# Allegro board PLL_SQ.brd
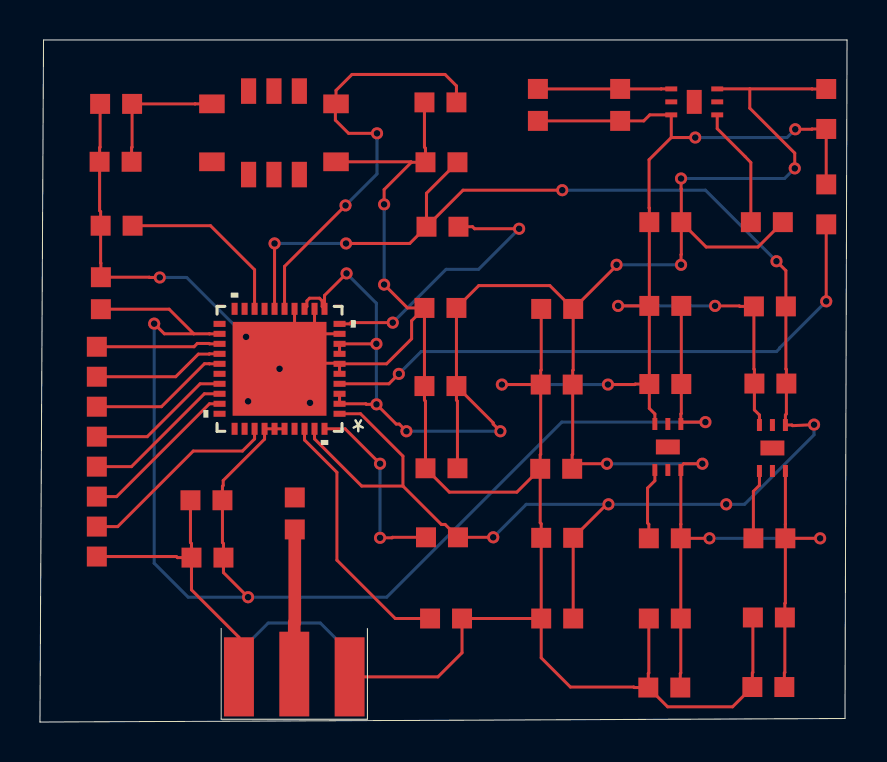
[diagram p0: board, top side]
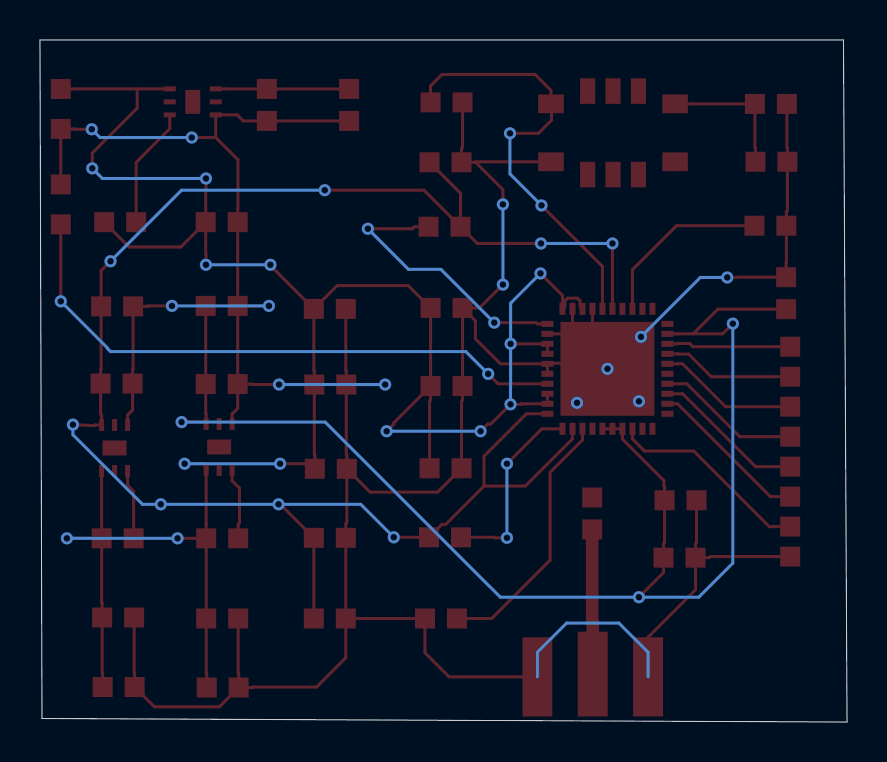
[diagram p1: board, bottom side, seen from below]

Outline 40.39 x 34.14 mm; copper layers: TOP, BOTTOM. Coordinates in mm from the lower left corner of the outline.
Outline path: 0,0 40.28,0.18 40.39,34.14 0.18,34.14 0,0

## Placement (name value [footprint] x y rotation side)
5V1  HEADER 2  [HEADER2]  39.34 30.68 270 top
C1  CAP  [CAPC1608N]  3.81 30.94 0 top
C2  CAP  [CAPC1608N]  3.78 28.04 0 top
C3  CAP  [CAPC1608N]  20.04 31.01 0 top
C4  CAP  [CAPC1608N]  20.09 28.02 0 top
C5  0.001uF  [CAPC1608N]  3.84 24.84 0 top
C6  CAP  [CAPC1608N]  20.04 20.73 0 top
C7  CAP  [CAPC1608N]  25.88 20.68 0 top
C8  1uF  [CAPC1608N]  3.05 21.46 90 top
C9  CAP  [CAPC1608N]  25.86 16.89 0 top
C10  1uF  [CAPC1608N]  20.04 16.81 0 top
C11  0.1uF  [CAPC1608N]  20.09 12.7 0 top
C12  0.1uF  [CAPC1608N]  25.83 12.67 0 top
C13  0.001uF  [CAPC1608N]  20.12 9.25 180 top
C14  100pF  [CAPC1608N]  12.75 10.44 90 top
C15  1uF  [CAPC1608N]  8.33 11.1 0 top
C16  0.1uF  [CAPC1608N]  8.38 8.23 0 top
C17  10pF  [CAPC1608N]  25.88 9.22 0 top
C18  0.1uF  [CAPC1608N]  25.88 5.18 0 top
C19  100pF  [CAPC1608N]  20.32 5.18 180 top
C20  1uF  [CAPC1608N]  36.53 20.8 0 top
C21  0.1uF  [CAPC1608N]  36.55 16.94 0 top
C22  0.1uF  [CAPC1608N]  36.47 5.23 0 top
C23  4.7uF  [CAPC1608N]  36.45 1.75 0 top
C24  1uF  [CAPC1608N]  24.92 30.89 90 top
C25  0.1uF  [CAPC1608N]  29.03 30.89 90 top
C26  0.1uF  [CAPC1608N]  31.29 25.02 0 top
C27  0.1uF  [CAPC1608N]  31.27 5.18 0 top
C28  4.5uF  [CAPC1608N]  31.24 1.73 0 top
C29  1uF  [CAPC1608N]  31.29 20.83 0 top
C30  0.1uF  [CAPC1608N]  31.29 16.92 0 top
GPIO_SPI1  GPIO_SPI  [HEADER8]  2.84 14.78 270 top
J1  SMA_3  [SMA_AMPHENOL_S]  12.73 4.52 270 top
LP5900_3V3_A1  LP5900  [SMP6_1_2]  36.65 13.72 180 top
LP5900_3V3_A2  LP5900  [SMP6_1_2]  32.74 31.04 270 top
LP5900_3V3_D1  LP5900  [SMP6_1_2]  31.42 13.77 180 top
PLL1  hmc701  [HCP_40_1]  11.99 17.68 180 top
PLL_OUT1  CON2  [HEADER2]  39.34 25.91 90 top
R1  0  [CAPC1608N]  20.14 24.79 180 top
R2  10K  [CAPC1608N]  36.5 9.19 0 top
R3  10K  [CAPC1608N]  36.37 25.02 0 top
R4  10K  [CAPC1608N]  31.27 9.19 0 top
U1  -  [D75J]  11.71 29.49 0 top

## Library data of the parts
5V1 = HEADER 2
C1-C30 = CAP
GPIO_SPI1 = 8 HEADER
J1 = SMA_3
LP5900_3V3_A1 LP5900_3V3_A2 LP5900_3V3_D1 = lp5900
PLL1 = hmc701
PLL_OUT1 = CON2
R1-R4 = RES
U1 = D75J

## Footprints (pads in the part's own frame, mm; a bottom-side part is the same pattern mirrored in y, then rotated)
CAPC1608N
  rect 1x1 smd: 1(-0.8,0) 2(0.8,0)
D75J
  rect 0.76x1.28 smd: 1(-1.27,-2.09) 2(0,-2.09) 3(1.27,-2.09) 6(1.27,2.09) 7(0,2.09) 8(-1.27,2.09)
  rect 1.28x0.94 smd: 4(3.105,-1.45) 5(3.105,1.45) 9(-3.105,1.45) 10(-3.105,-1.45)
HCP_40_1
  rect 0.605x0.305 smd: 1(-3.002,2.25) 2(-3.002,1.75) 3(-3.002,1.25) 4(-3.002,0.75) 5(-3.002,0.25) 6(-3.002,-0.25) 7(-3.002,-0.75) 8(-3.002,-1.25) 9(-3.002,-1.75) 10(-3.002,-2.25) 21(3.002,-2.25) 22(3.002,-1.75) 23(3.002,-1.25) 24(3.002,-0.75) 25(3.002,-0.25) 26(3.002,0.25) 27(3.002,0.75) 28(3.002,1.25) 29(3.002,1.75) 30(3.002,2.25)
  rect 0.305x0.605 smd: 11(-2.25,-3.002) 12(-1.75,-3.002) 13(-1.25,-3.002) 14(-0.75,-3.002) 15(-0.25,-3.002) 16(0.25,-3.002) 17(0.75,-3.002) 18(1.25,-3.002) 19(1.75,-3.002) 20(2.25,-3.002) 31(2.25,3.002) 32(1.75,3.002) 33(1.25,3.002) 34(0.75,3.002) 35(0.25,3.002) 36(-0.25,3.002) 37(-0.75,3.002) 38(-1.25,3.002) 39(-1.75,3.002) 40(-2.25,3.002)
  rect 4.7x4.7 smd: 41(0,0)
HEADER2
  rect 1x1 smd: 1(-1,0) 2(1,0)
HEADER8
  rect 1x1 smd: 1(-4,0) 2(-2.5,0) 3(-1,0) 4(0.5,0) 5(2,0) 6(3.5,0) 7(5,0) 8(6.5,0)
SMA_AMPHENOL_S
  rect 3.962x1.499 smd: 1(2.261,2.769) 3(2.261,-2.769)
  rect 4.242x1.499 smd: 2(2.121,0)
SMP6_1_2
  rect 0.25x0.6 smd: 1(-0.65,-1.15) 2(0,-1.15) 3(0.65,-1.15) 4(0.65,1.15) 5(0,1.15) 6(-0.65,1.15)
  rect 1.2x0.75 smd: 7(0,0)

## Nets
3VANALOG: C4.2(B) C13.1(A) C17.2(B) C18.2(B) C20.2(B) C21.2(B) LP5900_3V3_A1.1(OUT) PLL1.1(VCCPRS) PLL1.16(RVDD) PLL1.39(VCCHF) R1.2(B)
3VDIGITAL: C8.1(A) C15.2(B) C16.2(B) C29.2(B) C30.2(B) LP5900_3V3_D1.1(OUT) PLL1.22(DVDD1) PLL1.34(DVDIO) PLL1.35(DVDD2) PLL1.36(DVDDQ)
+5V: 5V1.1 C6.2(B) C7.2(B) C9.2(B) C10.2(B) C11.2(B) C12.2(B) C22.2(B) C23.2(B) C26.2(B) C27.2(B) C28.2(B) LP5900_3V3_A1.6(IN) LP5900_3V3_A2.6(IN) LP5900_3V3_D1.6(IN) PLL1.2(VCCOA) PLL1.3(VPPCP) PLL1.7(VPPDRV) PLL1.8(VDDPD) PLL1.11(VDDPDV) PLL1.13(VDDPDR) R2.2(B) R3.2(B) R4.2(B)
GND: 5V1.2 C1.1(A) C2.1(A) C3.1(A) C4.1(A) C5.1(A) C6.1(A) C7.1(A) C8.2(B) C9.1(A) C10.1(A) C11.1(A) C12.1(A) C15.1(A) C16.1(A) C17.1(A) C18.1(A) C19.1(A) C20.1(A) C21.1(A) C22.1(A) C23.1(A) C24.1(A) C25.1(A) C26.1(A) C27.1(A) C28.1(A) C29.1(A) C30.1(A) GPIO_SPI1.8 J1.1 J1.3 LP5900_3V3_A1.3(GND) LP5900_3V3_A2.3(GND) LP5900_3V3_D1.3(GND) PLL1.5(GNDCP) PLL1.6(GNDDRV) PLL1.9(GNDPD) PLL1.12(GNDPDV) PLL1.14(GNDPDR) PLL1.41(GND) PLL_OUT1.2 U1.4(GND)
GP01: GPIO_SPI1.1 PLL1.23(GP01)
GP02: GPIO_SPI1.2 PLL1.24(GP02)
GP03: GPIO_SPI1.3 PLL1.25(GP03)
PLL_OUT: PLL1.4(CP) PLL_OUT1.1
SCK: GPIO_SPI1.6 PLL1.29(SCK)
SDI: GPIO_SPI1.5 PLL1.28(SDI)
SDO: GPIO_SPI1.7 PLL1.33(LD_SDO)
SEN: GPIO_SPI1.4 PLL1.27(SEN)
TCXO_POWER: C24.2(B) C25.2(B) LP5900_3V3_A2.1(OUT)
TXCO_POWER: C1.2(B) C2.2(B) U1.9(VCC)
VCOIP: C14.1(A) J1.2
N78296: C19.2(B) PLL1.38(VCOIN)
N78304: C14.2(B) PLL1.37(VCOIP)
N78474: PLL1.10(N/C1) R1.1(A)
N78616: C5.2(B) PLL1.18(REFCAP)
N78878: LP5900_3V3_D1.4(EN) R4.1(A)
N79360: LP5900_3V3_A1.4(EN) R2.1(A)
N80357: C3.2(B) PLL1.15(XREFP) U1.5(OUT)
N81782: LP5900_3V3_A2.4(EN) R3.1(A)
N780341: C13.2(B) PLL1.40(BIAS)

Pads without a net: LP5900_3V3_A1 2 5 7; LP5900_3V3_A2 2 5 7; LP5900_3V3_D1 2 5 7; PLL1 17 19 20 21 26 30 31 32; U1 1 2 3 6 7 8 10

## Via types
v1: diameter 0.61, hole 0.33, TOP to BOTTOM, 45 vias

## Routing (per net, layer and track width the routed paths; a pad name or vN(x,y) marks a point on that pad's centre or on a via; arc(x,y) is an arc through that point)
3VANALOG: length 86.9
  TOP w0.152: v1(15.32,23.95) 18.5,23.95 R1.2 ; R1.2 21.17,26.62 v1(26.14,26.62) ; R1.2 19.34,26.47 C4.2 ; PLL1.16 v1(11.74,23.95) ; v1(38.73,14.88) 37.66,14.83 37.63,14.87 LP5900_3V3_A1.1 37.3,15.37 37.35,15.42 C21.2 37.35,17.65 37.33,17.67 C20.2 37.33,22.59 v1(36.86,23.06) ; PLL1.1 16.04,15.43 18.16,13.31 18.16,11.81 ; v1(28.45,10.9) 28.36,10.9 C17.2 C18.2 ; v1(22.68,9.25) C13.1 20.27,9.89 20.09,9.89 18.16,11.81 ; 18.16,11.81 16.1,11.81 13.74,14.17 PLL1.39
  BOTTOM w0.152: v1(26.14,26.62) 33.3,26.62 v1(36.86,23.06) ; v1(22.68,9.25) 24.33,10.9 v1(28.45,10.9) v1(34.34,10.9) 35.26,10.9 38.73,14.38 v1(38.73,14.88) ; v1(11.74,23.95) v1(15.32,23.95)
3VDIGITAL: length 70.6
  TOP w0.152: C8.1 6.46,20.66 7.7,19.43 ; 7.7,19.43 8.48,19.43 8.48,19.43 PLL1.22 ; 7.7,19.43 6.22,19.43 v1(5.71,19.94) ; PLL1.36 PLL1.35 PLL1.34 11.24,14.16 9.17,12.09 9.17,11.84 9.13,11.8 C15.2 9.13,8.98 9.18,8.93 C16.2 9.18,7.48 v1(10.41,6.25) ; C29.2 C30.2 32.09,15.44 32.07,15.42 LP5900_3V3_D1.1 32.16,15.01 v1(33.3,15.01)
  BOTTOM w0.152: v1(33.3,15.01) 26.11,15.01 17.35,6.25 v1(10.41,6.25) 7.42,6.25 5.71,7.95 v1(5.71,19.94)
+5V: length 120
  TOP w0.152: R4.2 32.07,9.9 32.07,9.9 LP5900_3V3_D1.6 32.07,12.79 32.21,12.93 v1(33.15,12.93) ; R4.2 C27.2 32.07,2.46 32.04,2.43 C28.2 ; R4.2 v1(33.5,9.19) ; PLL1.13 13.36,20.8 13.36,21.08 13.49,21.21 13.99,21.21 14.12,21.08 14.12,20.8 PLL1.11 14.24,21.35 v1(15.34,22.45) ; 26.63,12.93 v1(28.37,12.93) ; 26.63,12.93 C12.2 ; 26.63,12.93 26.63,13.38 26.66,13.4 C9.2 26.66,17.59 26.68,17.62 C7.2 ; C7.2 25.51,21.84 21.96,21.84 C6.2 C10.2 ; C7.2 28.85,22.85 v1(28.85,22.89) ; 5V1.1 38.64,31.68 38.64,31.69 35.52,31.69 ; PLL1.7 PLL1.8 v1(16.83,18.93) ; v1(39.04,9.19) R2.2 ; R2.2 37.3,9.9 37.3,9.9 LP5900_3V3_A1.6 ; R2.2 37.3,5.96 37.27,5.94 C22.2 37.27,2.48 37.25,2.46 C23.2 ; PLL1.3 PLL1.2 16.3,15.93 16.33,15.9 v1(16.84,15.9) 17.83,14.91 17.98,14.91 v1(18.34,14.55) ; C10.2 20.84,16.11 20.89,16.06 C11.2 ; C10.2 22.68,14.98 22.68,14.91 v1(23.04,14.55) ; v1(37.77,27.71) 37.77,28.47 35.52,30.72 35.52,31.69 ; v1(32.08,22.89) 32.08,23.39 32.09,23.41 C26.2 ; C26.2 33.34,23.77 35.93,23.77 R3.2 ; C26.2 32.09,26.68 32.08,26.7 v1(32.08,27.2) ; 35.52,31.69 LP5900_3V3_A2.6
  BOTTOM w0.152: v1(32.08,27.2) 37.26,27.2 v1(37.77,27.71) ; v1(33.5,9.19) v1(39.04,9.19) ; v1(18.34,14.55) v1(23.04,14.55) ; v1(15.34,22.45) 16.83,20.96 v1(16.83,18.93) 16.83,16.74 16.84,16.74 v1(16.84,15.9) ; v1(28.37,12.93) v1(33.15,12.93) ; v1(28.85,22.89) v1(32.08,22.89)
GND: length 195.2
  TOP w0.152: C24.1 C25.1 30.21,30.09 30.52,30.39 LP5900_3V3_A2.3 31.59,29.25 ; C9.1 v1(23.11,16.89) ; C9.1 25.06,13.4 25.03,13.38 C12.1 ; C9.1 25.06,17.59 25.08,17.62 C7.1 ; C15.1 7.53,8.98 7.58,8.93 C16.1 ; v1(17.22,21.89) 18.39,20.73 C6.1 ; C16.1 7.58,6.62 9.96,4.24 J1.3 ; C16.1 6.88,8.23 6.83,8.28 GPIO_SPI1.8 ; 31.59,29.25 v1(32.79,29.25) ; 31.59,29.25 30.48,28.14 30.48,25.74 30.49,25.72 C26.1 C29.1 ; 13.74,19.43 13.74,19.43 15.19,19.43 15.19,19.43 PLL1.9 ; 13.74,19.43 PLL1.12 ; 13.74,19.43 12.74,18.43 ; C18.1 25.08,3.21 26.54,1.75 29.71,1.75 29.74,1.73 C28.1 ; C18.1 C17.1 25.08,9.92 25.03,9.97 C12.1 ; C18.1 C19.1 21.12,3.47 19.91,2.26 15.49,2.26 ; C30.1 30.49,15.7 30.77,15.42 LP5900_3V3_D1.3 ; C30.1 C29.1 ; C30.1 29.79,16.92 29.76,16.89 v1(28.42,16.89) ; 18.59,28.02 18.56,28.04 U1.4 ; 18.59,28.02 C4.1 19.29,28.72 19.24,28.77 C3.1 ; 18.59,28.02 17.22,26.65 v1(17.22,25.91) ; C6.1 C10.1 19.24,16.11 19.29,16.06 C11.1 20.49,11.51 23.86,11.51 C12.1 ; C6.1 18.6,20.08 18.6,19.18 17.34,17.93 PLL1.6 ; C28.1 30.44,2.43 30.47,2.46 C27.1 ; C28.1 31.41,0.76 34.66,0.76 C23.1 35.65,2.46 35.67,2.48 C22.1 ; C29.1 v1(28.93,20.83) ; PLL_OUT1.2 5V1.2 38.64,29.68 38.63,29.67 v1(37.8,29.67) ; LP5900_3V3_A1.3 36,15.37 35.75,15.62 C21.1 35.75,17.65 35.73,17.67 C20.1 35.02,20.8 35,20.83 v1(33.78,20.83) ; 12.74,18.43 PLL1.14 ; 12.74,18.43 v1(11.99,17.68) 13.61,17.68 13.89,17.96 14.96,17.96 PLL1.6 ; C1.1 3.01,28.77 2.98,28.74 C2.1 2.98,25.6 3.04,25.54 C5.1 3.04,22.98 3.05,22.97 C8.2 5.47,22.26 5.49,22.25 v1(5.99,22.25) ; PLL1.6 PLL1.5
  BOTTOM w0.152: 15.49,2.26 15.49,3.49 14.03,4.95 11.42,4.95 9.96,3.49 J1.3 ; v1(28.93,20.83) v1(33.78,20.83) ; v1(23.11,16.89) v1(28.42,16.89) ; v1(32.79,29.25) 37.38,29.25 v1(37.8,29.67) ; v1(10.31,19.28) 7.34,22.25 v1(5.99,22.25) ; v1(17.22,21.89) v1(17.22,25.91)
  vias: v1(10.41,16.05) v1(13.51,15.98)
GP01: length 6.2
  TOP w0.152: PLL1.23 8.48,18.93 8.46,18.95 7.87,18.95 7.71,18.78 GPIO_SPI1.1
GP02: length 6.6
  TOP w0.152: PLL1.24 8.48,18.43 8.47,18.41 7.92,18.41 6.79,17.28 GPIO_SPI1.2
GP03: length 7
  TOP w0.152: GPIO_SPI1.3 6.08,15.78 8.23,17.93 8.48,17.93 8.48,17.93 PLL1.25
PLL_OUT: length 30
  TOP w0.152: 39.34,24.99 PLL_OUT1.1 v1(39.34,21.06) ; v1(17.96,17.42) 17.46,16.93 PLL1.4
  BOTTOM w0.152: v1(17.96,17.42) 19.08,18.54 36.86,18.54 37.01,18.69 37.01,18.72 v1(39.34,21.06)
SCK: length 8.1
  TOP w0.152: GPIO_SPI1.6 3.84,11.28 8.48,15.93 PLL1.29
SDI: length 7.7
  TOP w0.152: PLL1.28 8.22,16.43 4.58,12.78 GPIO_SPI1.5
SDO: length 10.2
  TOP w0.152: PLL1.33 10.74,14.17 10.13,13.56 7.67,13.56 3.89,9.78 GPIO_SPI1.7
SEN: length 7.2
  TOP w0.152: PLL1.27 8.01,16.93 5.37,14.28 GPIO_SPI1.4
TCXO_POWER: length 6.7
  TOP w0.152: LP5900_3V3_A2.1 31.09,31.69 31.09,31.69 C25.2 C24.2
TXCO_POWER: length 6.9
  TOP w0.152: C2.2 4.58,28.74 4.61,28.77 C1.2 7.76,30.94 7.76,30.94 U1.9
VCOIP: length 7.2
  TOP w0.635: J1.2 12.73,4.97 12.75,4.99 C14.1
N78296: length 13.1
  TOP w0.152: C19.2 17.78,5.18 14.86,8.1 14.86,12.5 13.24,14.12 PLL1.38
N78474: length 14
  TOP w0.152: v1(23.98,24.69) 21.75,24.69 21.65,24.79 R1.1 ; v1(17.65,19.99) 15.56,19.99 15.5,19.93 PLL1.10
  BOTTOM w0.152: v1(17.65,19.99) 20.32,22.66 21.95,22.66 v1(23.98,24.69)
N78616: length 9
  TOP w0.152: PLL1.18 10.74,22.64 8.53,24.84 C5.2
N78878: length 3.6
  TOP w0.152: LP5900_3V3_D1.4 30.77,12.08 30.4,11.71 30.4,9.96 30.47,9.9 R4.1
N79360: length 3.5
  TOP w0.152: LP5900_3V3_A1.4 36,11.85 35.7,11.54 R2.1
N80357: length 22
  TOP w0.152: PLL1.15 12.24,22.81 v1(15.29,25.86) ; C3.2 20.84,31.84 20.27,32.41 15.61,32.41 14.81,31.61 U1.5 14.78,30.91 14.78,30.12 15.44,29.46 v1(16.87,29.46)
  BOTTOM w0.152: v1(15.29,25.86) 16.87,27.43 v1(16.87,29.46)
N81782: length 6.1
  TOP w0.152: LP5900_3V3_A2.4 33.89,29.7 35.29,28.3 35.57,28 R3.1
N780341: length 9.5
  TOP w0.152: v1(17.02,12.93) 15.27,14.68 PLL1.40 ; C13.2 17.64,9.25 17.62,9.22 v1(17.02,9.22)
  BOTTOM w0.152: v1(17.02,12.93) v1(17.02,9.22)
